# Altium PCB ICE_DfMux_QC.PcbDoc
Units mil, origin at the board's own origin, x right, y up, seen from the top; angles counter-clockwise.
Board outline 8460 x 2275 mil, 4 copper layers (Top Layer, Internal Plane 1, Internal Plane 2, Bottom Layer), stack 61.8 mil thick; 82 components, 163 nets, 561 pads, 63 vias.
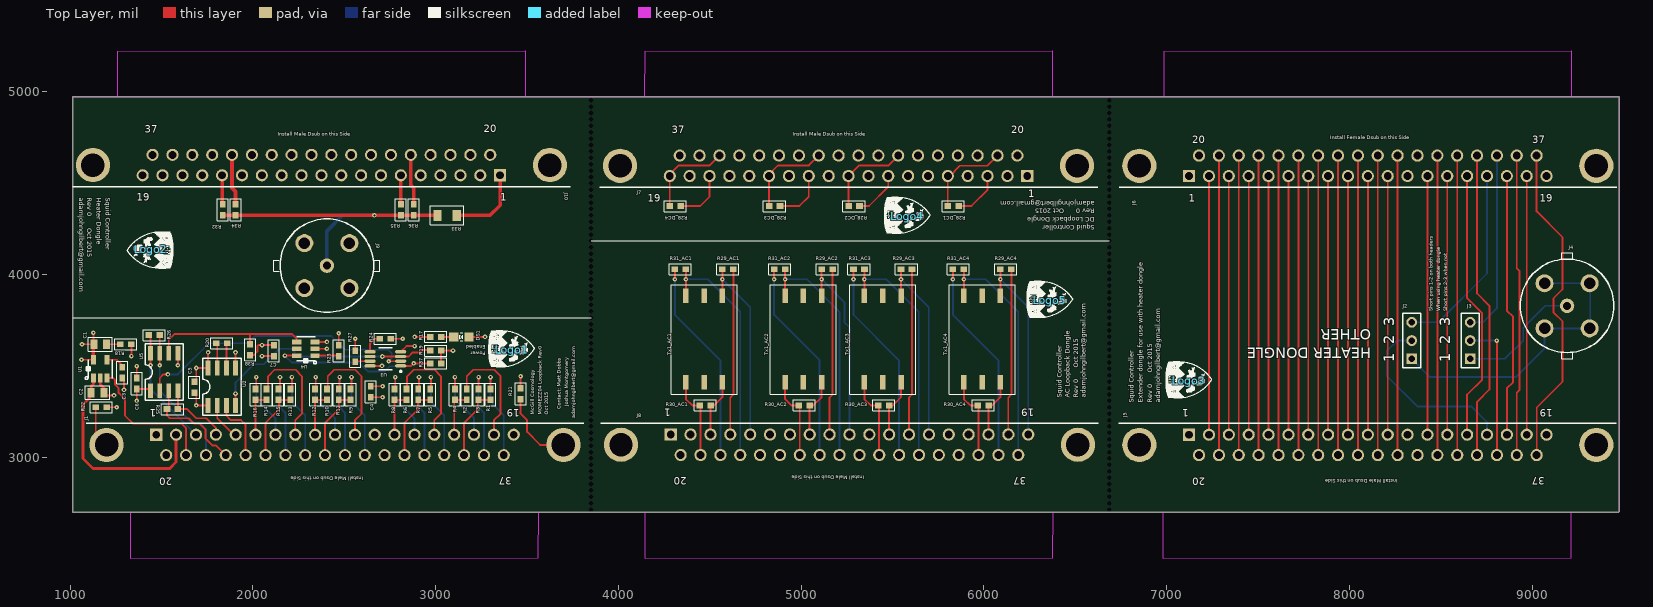
[diagram p0: Top Layer view]
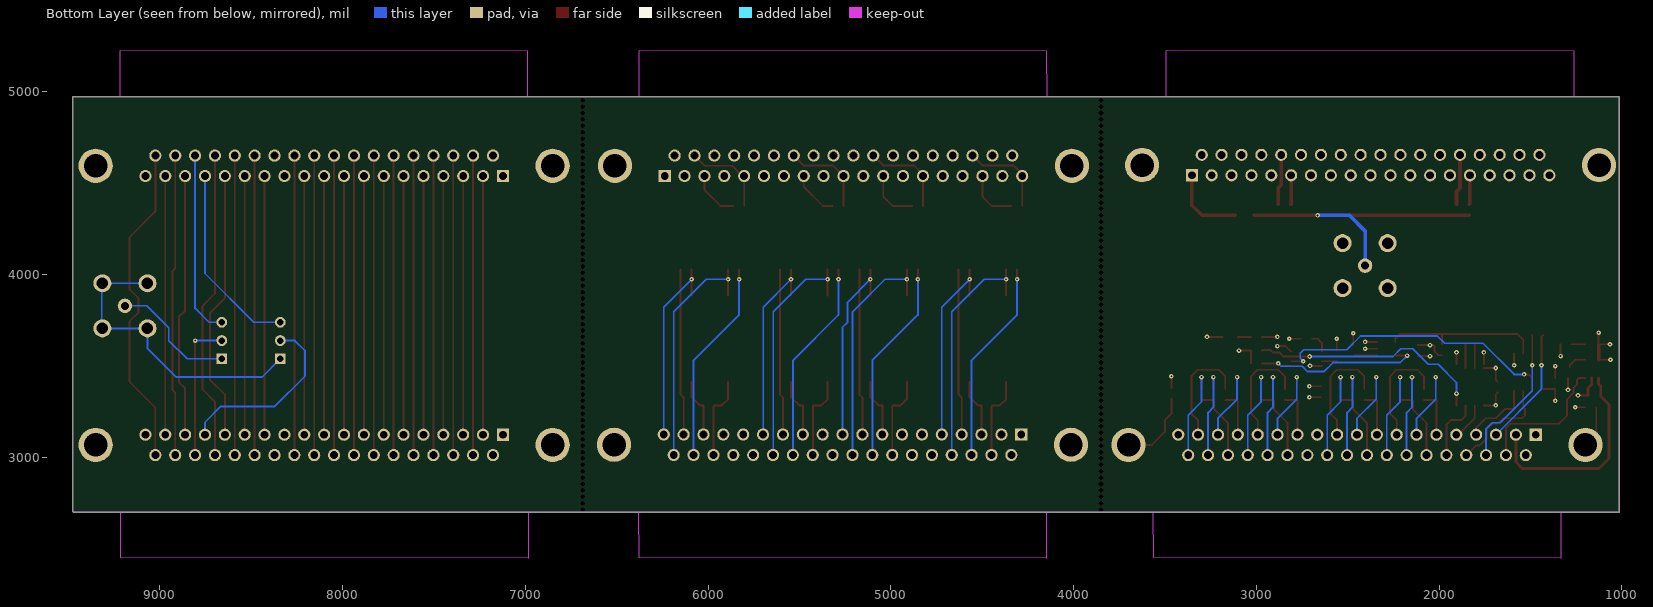
[diagram p1: Bottom Layer view, seen from below]
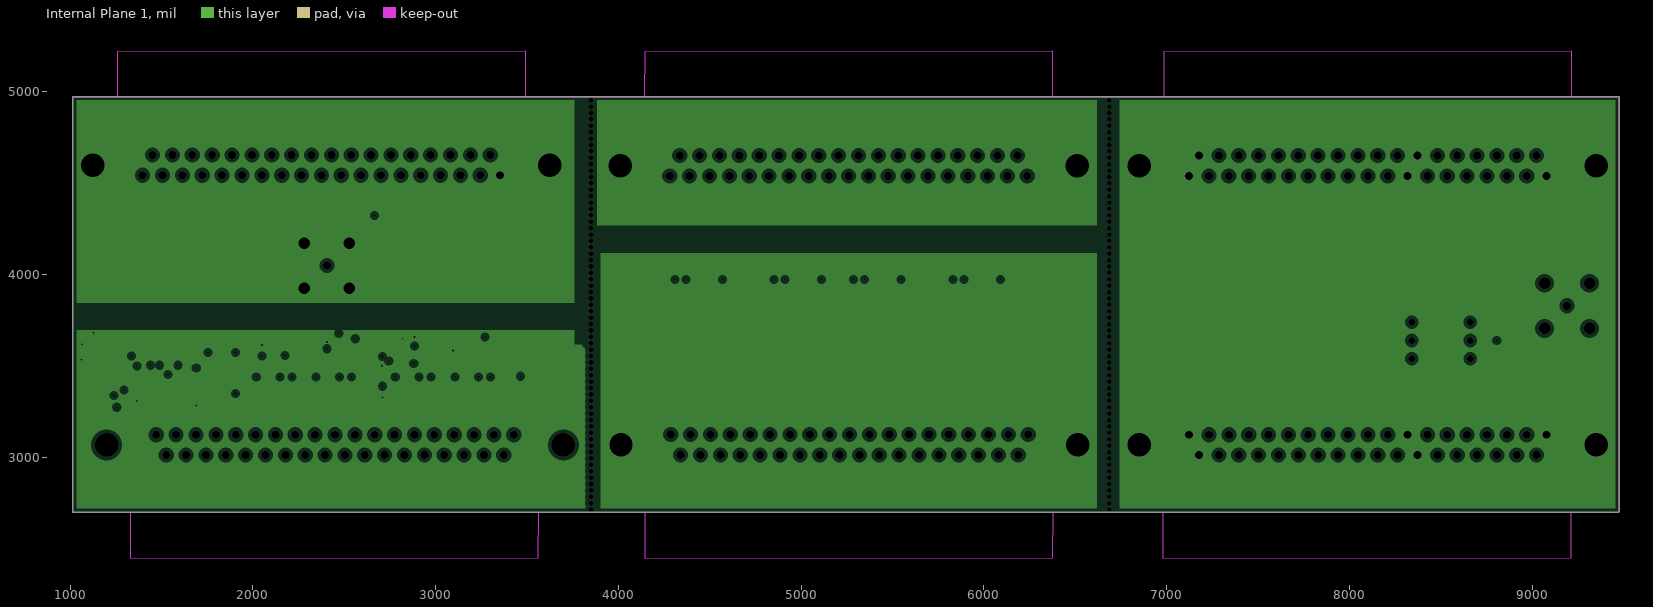
[diagram p2: Internal Plane 1, clearances drawn from the general rule]
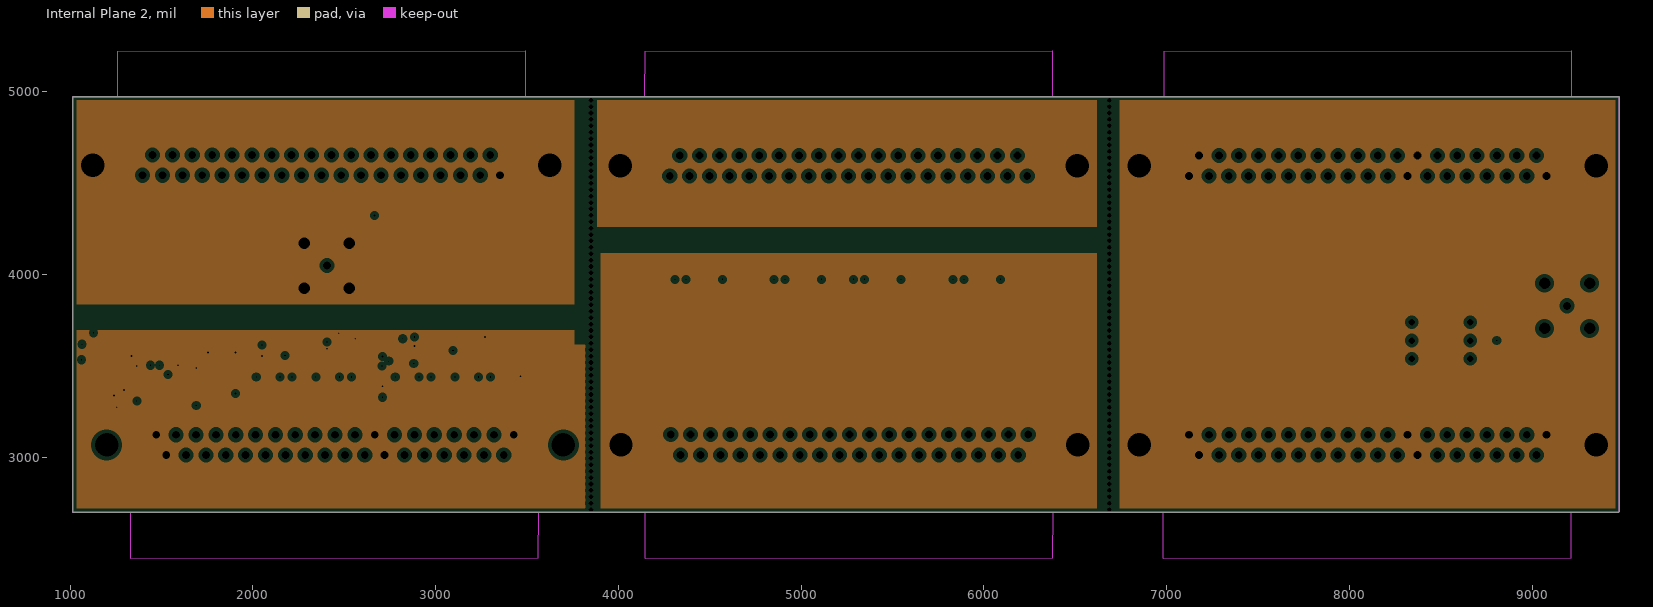
[diagram p3: Internal Plane 2, clearances drawn from the general rule]

## Layer stack, top to bottom
Top Solder: solder mask 0.4, Solder Resist, Dk 3.5
Top Layer: signal copper 0.7
Dielectric 1: core 6, FR-4, Dk 4.2
Internal Plane 1: plane copper 0.7, net (Multiple Nets)
Dielectric 3: prepreg 47, Dk 4.2
Internal Plane 2: plane copper 0.7, net GND
Dielectric 2: core 6, FR-4, Dk 4.2
Bottom Layer: signal copper 0.7
Bottom Solder: solder mask 0.4, Solder Resist, Dk 3.5

## Board outline
1015,2700 1015,4975 9475,4975 9475,2705 9470,2700

## Design rules (kind name [scope] priority, off if disabled: settings)
Clearance [All] p1: gap=7
DiffPairsRouting [All] p1: maxlimit=10 minlimit=10 mostfreqgap=10 toplayer_minwidth=15 toplayer_maxwidth=15 toplayer_prefwidth=15 bottomlayer_minwidth=15 bottomlayer_maxwidth=15 bottomlayer_prefwidth=15 maxuncoupledlength=500
HoleSize [All] p1: absolutevalues=TRUE maxlimit=200 minlimit=1 maxpercent=80.000 minpercent=20.000
MinimumSolderMaskSliver [All] p1: minsoldermaskwidth=3.49
PlaneClearance [All] p1: clearance=20
PlaneConnect [All] p1: planeconnectstyle=Relief reliefexpansion=20 reliefentries=4 reliefconductorwidth=10 reliefairgap=10
PolygonConnect [All] p1: connectstyle=Relief reliefconductorwidth=10 reliefentries=4 polygonreliefangle="90 Angle" airgapwidth=10
RoutingVias [All] p1: holewidth=28 width=50 viastyle="Through Hole" minholewidth=28 minwidth=50 maxholewidth=28 maxwidth=50
SilkToSilkClearance [All] p1: silktosilkclearance=0
SilkToSolderMaskClearance [IsPad] p1: minsilkscreentomaskgap=5 clearancetoexposedcopper=TRUE
SolderMaskExpansion [All] p1: expansion=4
Width [All] p1: maxlimit=100 minlimit=10 preferedwidth=10
23 further rules are at their usual default settings.

## Classes and differential pairs
component class SQDEX: J2 J3 J4 J5 J6 Logo2
component class SQD2: J8 Logo4
component class SQD1: J7 Logo3
component class M1: C1 C2 C3 C4 C5 C6 C7 DS1 J1 Logo1 R1 R2 R3 R4 R5 R6 R7 R8 R9 R10 R11 R12 R13 R14 R15 R16 R17 R18 R19 R20 R21 R22 R23 R24 R25 R26 R27 R37 R38 U1 U2 U3 U4 U5
channel class Transformer: AC1 AC2 AC3 AC4
channel class Resistor: DC1 DC2 DC3 DC4
component class SQD3: J9 J10 Logo5 R32 R33 R34 R35 R36
component class DC4: R28_DC4
component class DC3: R28_DC3
component class DC2: R28_DC2
component class DC1: R28_DC1
component class AC4: R29_AC4 R30_AC4 R31_AC4 Tx1_AC4
component class AC3: R29_AC3 R30_AC3 R31_AC3 Tx1_AC3
component class AC2: R29_AC2 R30_AC2 R31_AC2 Tx1_AC2
component class AC1: R29_AC1 R30_AC1 R31_AC1 Tx1_AC1
differential pair SDA_MOSI: +SDA_MOSI_P -SDA_MOSI_N
differential pair SDA_MISO: +SDA_MISO_P -SDA_MISO_N
differential pair SCL: +SCL_P -SCL_N

## Components (designator, comment, footprint, x,y, rotation, side; value= is the part's Value field where it differs from the comment)
C1 "4.7uF, 10V" 0805 1200,3620 r180 top
C2 "4.7uF, 10V" 0805 1185,3355 r180 top
C3 "470pF" 0603 1285,3435 r90 top
C4 "0.1uF" 0603 2645,3390 r270 top
C5 "0.1uF" 0603 1680,3415 r270 top
C6 "0.1uF" 0603 1365,3435 r270 top
C7 "0.1uF" 0603 2115,3555 r90 top
DS1 "LED, 0805, Green" 0805L 3099.42,3660 r0 top
J1 "DB37M" DSUB37-M 1199.25,3069.02 r180 top
J2 "Header 3pin 0.1\"" HDR1X3 8340,3540 r90 top
J3 "Header 3pin 0.1\"" HDR1X3 8660,3540 r90 top
J4 "Vertical BNC" BNCVert 9190,3830 r270 top
J5 "DB37M" DSUB37-M 6850.08,3069.09 r180 top
J6 "DB37F" DSUB37-F 8100,4540 r0 top
J7 "DB37M" DSUB37-M 6509,4596 r0 top
J8 "DB37M" DSUB37-M 4014,3070 r180 top
J9 "Vertical BNC" BNCVert 2405,4050 r0 top
J10 "DB37M" DSUB37-M 3625,4600 r0 top
Logo1 "McGillLogo" McGillLogo1 3415,3590 r90 top
Logo2 "McGillLogo" McGillLogo1 1440,4140 r270 top
Logo3 "McGillLogo" McGillLogo1 7120,3420 r90 top
Logo4 "McGillLogo" McGillLogo1 5580,4320 r90 top
Logo5 "McGillLogo" McGillLogo1 6360,3860 r90 top
R1 "348" 0603 3300,3315 r90 top
R2 "348" 0603 3170,3315 r90 top
R3 "348" 0603 3235,3315 r90 top
R4 "348" 0603 3105,3315 r90 top
R5 "348" 0603 2970,3315 r90 top
R6 "348" 0603 2840,3315 r90 top
R7 "348" 0603 2905,3315 r90 top
R8 "348" 0603 2775,3315 r90 top
R9 "348" 0603 2535,3315 r90 top
R10 "348" 0603 2405,3315 r90 top
R11 "348" 0603 2470,3315 r90 top
R12 "348" 0603 2340,3315 r90 top
R13 "348" 0603 2205,3315 r90 top
R14 "348" 0603 2075,3315 r90 top
R15 "348" 0603 2140,3315 r90 top
R16 "348" 0603 2015,3315 r90 top
R17 "499" 0603 2970,3660 r0 top
R18 "1" 0603 1335,3620 r180 top
R19 "4.99k" 0603 2970,3585 r0 top
R20 "DNL" 0603 1860,3625 r180 top
R21 "0" 0603 3465,3320 r90 top
R22 "0" 0603 1200,3275 r180 top
R23 "DNL" 0603 2470,3555 r90 top
R24 "4.99k" 0603 2695,3650 r0 top
R25 "100" 0603 1590,3265 r180 top
R26 "100" 0603 1430,3670 r0 top
R27 "4.99k" 0603 2560,3585 r270 top
R28_DC1 "10" 0603 5862,4376 r180 top (schematic designator R28)
R28_DC2 "10" 0603 5319,4376 r180 top (schematic designator R28)
R28_DC3 "10" 0603 4884,4376 r180 top (schematic designator R28)
R28_DC4 "10" 0603 4341,4376 r180 top (schematic designator R28)
R29_AC1 "1k" 0603 4629,4030 r180 top (schematic designator R29)
R29_AC2 "1k" 0603 5171.5,4030 r180 top (schematic designator R29)
R29_AC3 "1k" 0603 5606,4030 r180 top (schematic designator R29)
R29_AC4 "1k" 0603 6150,4030 r180 top (schematic designator R29)
R30_AC1 "10" 0603 4504,3285 r180 top (schematic designator R30)
R30_AC2 "10" 0603 5046.5,3285 r180 top (schematic designator R30)
R30_AC3 "10" 0603 5481,3285 r180 top (schematic designator R30)
R30_AC4 "10" 0603 6025,3285 r180 top (schematic designator R30)
R31_AC1 "1k" 0603 4309,4030 r0 top (schematic designator R31)
R31_AC2 "1k" 0603 4851.5,4030 r0 top (schematic designator R31)
R31_AC3 "1k" 0603 5286,4030 r0 top (schematic designator R31)
R31_AC4 "1k" 0603 5830,4030 r0 top (schematic designator R31)
R32 "10k" 0603 1835,4385 r270 top
R33 "100, 1206" 1206 3115,4325 r180 top
R34 "10k" 0603 1905,4385 r270 top
R35 "10k" 0603 2810,4385 r270 top
R36 "10k" 0603 2880,4385 r270 top
R37 "4.99k" 0603 2970,3515 r0 top
R38 "4.99k" 0603 1985,3620 r270 top
Tx1_AC1 "WB2010" WB2010 4569,3885 r270 top (schematic designator Tx1)
Tx1_AC2 "WB2010" WB2010 5111.5,3885 r270 top (schematic designator Tx1)
Tx1_AC3 "WB2010" WB2010 5546,3885 r270 top (schematic designator Tx1)
Tx1_AC4 "WB2010" WB2010 6090,3885 r270 top (schematic designator Tx1)
U1 "MIC5219-5.0YM5 TR" SOT23-5 1165,3435 r0 top
U2 "DS90C401M/NOPB" SO8 1755,3285 r90 top
U3 "P82B96DP,118" MSOP8-P82B96 2725,3540 r180 top
U4 "AD7414ARTZ-0500RL7" SOT23-6 2340,3595 r90 top
U5 "DS90C402M/NOPB" SO8 1440,3365 r90 top

## Footprints (in the part's own frame and the unit in brackets; to place one, negate y for a bottom-side part, rotate by r counter-clockwise, add the part's x,y. Pads: shape width x height; smd on the part's side, far side on the other; paste and mask are expansions set on the pad)
0603 [mil]
  rect 36x32 smd: 1(0,0) 2(60,0)
  silkscreen extent -31,-30 90,30, body extent -15,-15 75,15, height 39
0805 [mil]
  rect 38.5x52 smd: 1(0,0) 2(70,0)
  silkscreen extent -31,-38 101,38
0805L [mil] "0805 LED"
  rect 50x50 smd: 1(-0.4,0.18) 2(83.6,0.18)
  silkscreen extent 33,-22 50,22
1206 [mil]
  rect 45x60 smd: 1(0,0) 2(105,0)
  silkscreen extent -37,-51 144,51, body extent -30,-45 135,45, height 39
BNCVert [mm] "BNCVert"
  round 2.5 hole 1.6: 0(-3.13,3.13) 0(-3.13,-3.13) 0(3.13,3.13) 0(3.13,-3.13)
  round 2 hole 1.1: 1(0,0)
  silkscreen extent -7.37,-6.5 7.37,6.5
DSUB37-F [mm] "DSUB 37Pin Male"
  rect 1.69x1.69 hole 1.09: 1(-24.84,0)
  round 1.69 hole 1.09: 2(-22.08,0) 3(-19.32,0) 4(-16.56,0) 5(-13.8,0) 6(-11.04,0) 7(-8.28,0) 8(-5.52,0) 9(-2.76,0) 10(0,0) 11(2.76,0) 12(5.52,0) 13(8.28,0) 14(11.04,0) 15(13.8,0) 16(16.56,0) 17(19.32,0) 18(22.08,0) 19(24.84,0) 20(-23.461,2.84) 21(-20.701,2.84) 22(-17.941,2.84) 23(-15.181,2.84) 24(-12.421,2.84) 25(-9.661,2.84) 26(-6.901,2.84) 27(-4.141,2.84) 28(-1.381,2.84) 29(1.379,2.84) 30(4.139,2.84) 31(6.899,2.84) 32(9.659,2.84) 33(12.419,2.84) 34(15.179,2.84) 35(17.939,2.84) 36(20.699,2.84) 37(23.459,2.84)
  round 4.76 hole 3.26: 38(31.752,1.42) 39(-31.748,1.42)
  silkscreen extent -34.54,-1.58 34.6,-1.58, body extent -34.45,-2.03 34.86,17.04, height 12.55
DSUB37-M [mm] "DSUB 37Pin Male"
  rect 1.69x1.69 hole 1.09: 1(-6.912,-1.42)
  round 1.69 hole 1.09: 2(-9.672,-1.42) 3(-12.432,-1.42) 4(-15.192,-1.42) 5(-17.952,-1.42) 6(-20.712,-1.42) 7(-23.472,-1.42) 8(-26.232,-1.42) 9(-28.992,-1.42) 10(-31.752,-1.42) 11(-34.512,-1.42) 12(-37.272,-1.42) 13(-40.032,-1.42) 14(-42.792,-1.42) 15(-45.552,-1.42) 16(-48.312,-1.42) 17(-51.072,-1.42) 18(-53.832,-1.42) 19(-56.592,-1.42) 20(-8.291,1.42) 21(-11.051,1.42) 22(-13.811,1.42) 23(-16.571,1.42) 24(-19.331,1.42) 25(-22.091,1.42) 26(-24.851,1.42) 27(-27.611,1.42) 28(-30.371,1.42) 29(-33.131,1.42) 30(-35.891,1.42) 31(-38.651,1.42) 32(-41.411,1.42) 33(-44.171,1.42) 34(-46.931,1.42) 35(-49.691,1.42) 36(-52.451,1.42) 37(-55.211,1.42)
  round 4.76 hole 3.26: 38(0,0) 39(-63.5,0)
  silkscreen extent -66.29,-3 2.84,-3, body extent -66.21,-3.45 3.11,15.7, height 12.55
HDR1X3 [mm]
  rect 1.5x1.5 hole 0.889: 1(0,0)
  round 1.5 hole 0.889: 2(2.54,0) 3(5.08,0)
  silkscreen extent -1.27,-1.27 6.35,1.27
McGillLogo1 [mil] "McGillLogo"
  silkscreen extent -95,-127 106,124
MSOP8-P82B96 [mm] "TSOP, 8-Leads, Body 3.1x3.1mm (max), Pitch 0.65mm, IPC Medium Density"
  oval 1.55x0.45 smd paste-0.051 mask+0.102: 1(-2.125,0.975) 2(-2.125,0.325) 3(-2.125,-0.325) 4(-2.125,-0.975) 5(2.125,-0.975) 6(2.125,-0.325) 7(2.125,0.325) 8(2.125,0.975)
  silkscreen extent -2.25,-1.55 0.95,1.87, body extent -1.55,-1.55 1.55,1.55, height 1.1
SO8 [mil]
  round 10 on Top Overlay: 0(-40,40)
  rect 80x26 smd: 1(0,0) 2(0,-50) 3(0,-100) 4(0,-150) 5(205,-150) 6(205,-100) 7(205,-50) 8(205,0)
  silkscreen extent -52,-180 258,30, body extent -40,-165 245,15, height 39
SOT23-5 [mil]
  rect 26x50 smd: 1(-37.5,0) 2(0,0) 3(37.5,0) 4(37.5,100) 5(-37.5,100)
  silkscreen extent -83,-8 65,100
SOT23-6 [mil]
  rect 26x50 smd: 1(-37.5,0) 2(0,0) 3(37.5,0) 4(37.5,100) 5(0,100) 6(-37.5,100)
  silkscreen extent -83,-8 65,100
WB2010 [mm] "Transformer 1:1"
  round 0.508 on Top Overlay: 0(-2.032,1.524)
  rect 2x0.76 smd: 1(0,0) 2(0,-2.54) 3(0,-5.08) 4(12,-5.08) 5(12,-2.54) 6(12,0)
  silkscreen extent -1.52,-7.11 13.72,2.03

## Part data
C1 C2: library part "CAP 0805", "4.7uF 10V Capacitor, Ceramic, 0805"
C3: library part Cap0603, "470pF Capacitor, Ceramic, 0603"
C4 C5 C6 C7: library part Cap0603, "0.1uF 0603 Ceramic Capacitor"
DS1: library part LED, "LED GREEN CLEAR 0805 SMD"
J2 J3: library part Header3, "Header, 0.1\", 3-Pin straight"
J4 J9: library part BNCVertical
Logo1 Logo2 Logo3 Logo4 Logo5: library part Logo, "Silkscreen Logo"
R1 R2 R3 R4 R5 R6 R7 R8 R9 R10 R11 R12 R13 R14 R15 R16: library part Res0603, "348 Ohm RES 0603"
R17: library part "RES 0603", "499 Ohm RES 0603"
R18: library part Res0603, "1 Ohm RES 0603"
R19 R24 R27 R37 R38: library part Res0603, "4.99k Ohm RES 0603"
R20 R23: library part Res0603, "DO NOT LOAD (DNS)"
R21 R22: library part "RES 0603", "0 Ohm RES 0603"
R25 R26: library part "RES 0603", "100 Ohm RES 0603"
R28_DC1 R28_DC2 R28_DC3 R28_DC4 R30_AC1 R30_AC2 R30_AC3 R30_AC4: library part "RES 0603", "10 Ohm RES 0603"
R29_AC1 R29_AC2 R29_AC3 R29_AC4 R31_AC1 R31_AC2 R31_AC3 R31_AC4: library part "RES 0603", "1k RES 0603"
R32 R34 R35 R36: library part "RES 0603", "10k Ohm RES 0603"
R33: library part "RES 1206", "100 Ohm RES 1/4W 1206 SMD"
Tx1_AC1 Tx1_AC2 Tx1_AC3 Tx1_AC4: "WB2010 1:1 Transformer"
U1: library part TPS73601DBVR, "Adjustable 30uVrms noise 400mA regulator"
U2: "IC DRV LVDS DUAL DIFF SGNL 8SOIC"
U3: library part P82B96, "IC DUAL BI-DIR BUS BUFFER 8-TSSOP"
U4: "Digital Temperature Sensor, 11-Bit, +/-2 Degree Accurate"
U5: "IC REC LVDS DUAL DIFF SGNL 8SOIC"

## Free pads (board coordinates)
  round 10 hole 25 unplated: 3(3850,2715) 3(3850,2750) 3(3850,2785) 3(3850,2820) 3(3850,2855) 3(3850,2890) 3(3850,2925) 3(3850,2960) 3(3850,2995) 3(3850,3030) 3(3850,3065) 3(3850,3100) 3(3850,3135) 3(3850,3170) 3(3850,3205) 3(3850,3240) 3(3850,3275) 3(3850,3310) 3(3850,3345) 3(3850,3380) 3(3850,3415) 3(3850,3450) 3(3850,3485) 3(3850,3520) 3(3850,3555) 3(3850,3590) 3(3850,3625) 3(3850,3660) 3(3850,3695) 3(3850,3730) 3(3850,3765) 3(3850,3800) 3(3850,3835) 3(3850,3870) 3(3850,3905) 3(3850,3940) 3(3850,3975) 3(3850,4010) 3(3850,4045) 3(3850,4080) 3(3850,4115) 3(3850,4150) 3(3850,4185) 3(3850,4220) 3(3850,4255) 3(3850,4290) 3(3850,4325) 3(3850,4360) 3(3850,4395) 3(3850,4430) 3(3850,4465) 3(3850,4500) 3(3850,4535) 3(3850,4570) 3(3850,4605) 3(3850,4640) 3(3850,4675) 3(3850,4710) 3(3850,4745) 3(3850,4780) 3(3850,4815) 3(3850,4850) 3(3850,4885) 3(3850,4920) 3(3850,4955) 3(6685,2715) 3(6685,2750) 3(6685,2785) 3(6685,2820) 3(6685,2855) 3(6685,2890) 3(6685,2925) 3(6685,2960) 3(6685,2995) 3(6685,3030) 3(6685,3065) 3(6685,3100) 3(6685,3135) 3(6685,3170) 3(6685,3205) 3(6685,3240) 3(6685,3275) 3(6685,3310) 3(6685,3345) 3(6685,3380) 3(6685,3415) 3(6685,3450) 3(6685,3485) 3(6685,3520) 3(6685,3555) 3(6685,3590) 3(6685,3625) 3(6685,3660) 3(6685,3695) 3(6685,3730) 3(6685,3765) 3(6685,3800) 3(6685,3835) 3(6685,3870) 3(6685,3905) 3(6685,3940) 3(6685,3975) 3(6685,4010) 3(6685,4045) 3(6685,4080) 3(6685,4115) 3(6685,4150) 3(6685,4185) 3(6685,4220) 3(6685,4255) 3(6685,4290) 3(6685,4325) 3(6685,4360) 3(6685,4395) 3(6685,4430) 3(6685,4465) 3(6685,4500) 3(6685,4535) 3(6685,4570) 3(6685,4605) 3(6685,4640) 3(6685,4675) 3(6685,4710) 3(6685,4745) 3(6685,4780) 3(6685,4815) 3(6685,4850) 3(6685,4885) 3(6685,4920) 3(6685,4955)

## Via types
v1: diameter 25, hole 10, Top Layer to Bottom Layer, tented both sides, 63 vias

## Nets (pads, with @x,y where several pads share a name; then routed paths per layer and width w, separated by ;. In a path a pad name is that pad's centre, name@x,y a point inside that pad or via, vN(x,y) a via of type N, cw(c..) or ccw(c..) an arc to the next point about the centre after c; other vN are vias at no path point)
5VD: C1.2 C4.2 C5.2 C6.2 C7.2 R17.1 R19.2 R24.2 R37.2 R38.2 U1.5 U2.1 U3.8 U4.3 U5.1 | length 1200.5
  Top Layer w10: v1(1062.5,3535) U1.5 ; v1(1065,3620) C1.2 1127.5,3617.5 v1(1127.5,3682.5) ; v1(1365,3310) C6.2 U5.1@1430,3375 ; C5.2 1690,3345 v1(1690,3285) U2.1 ; R38.2 2005,3560 2025,3580 2025,3610 2030,3615 v1(2050,3615) C7.2 ; U4.3 v1(2405,3632.5) ; U3.8 v1(2706.34,3501.61) ; C4.2 v1(2710,3330) ; R24.2 v1(2820,3650) ; v1(2885,3660) R17.1 ; R37.2 R19.2 v1(3095,3585)
  Top Layer w20: U1.5 C1.2@1127.5,3617.5
ACCHAN1.BOLO_N: J8.36 R31_AC4.1 | length 1118.9
  Top Layer w10: v1(5830,3975) R31_AC4.1
  Bottom Layer w10: v1(5830,3975) 5830,3780 6078.74,3531.26 J8.36@6078.74,3014.09
ACCHAN1.BOLO_P: J8.18 R29_AC4.1 | length 911.1
  Top Layer w10: J8.18@6133.11,3125.91 6133.11,3328.11 6150,3345 R29_AC4.1
ACCHAN1.HEATER_P: J8.15
ACCHAN1.SQUID_BIAS_N: J8.34
ACCHAN1.SQUID_BIAS_P: J8.16
ACCHAN1.SQUID_COIL_N: J8.37 R31_AC4.2 Tx1_AC4.3 | length 1299.4
  Top Layer w10: Tx1_AC4.3 v1(5890,3975) R31_AC4.2
  Bottom Layer w10: v1(5890,3975) 6010,3975 6187.4,3797.6 J8.37@6187.4,3014.09
ACCHAN1.SQUID_COIL_P: J8.19 R29_AC4.2 Tx1_AC4.1 | length 1057
  Top Layer w10: Tx1_AC4.1 v1(6090,3975) R29_AC4.2
  Bottom Layer w10: v1(6090,3975) 6241.77,3823.23 J8.19@6241.77,3125.91
ACCHAN1.SQUID_SENSE_N: J8.17 R30_AC4.1 Tx1_AC4.6 | length 325.5
  Top Layer w10: J8.17@6024.45,3125.91 6024.45,3284.45 R30_AC4.1 6045,3285 6090,3330 Tx1_AC4.6
ACCHAN1.SQUID_SENSE_P: J8.35 R30_AC4.2 Tx1_AC4.4 | length 455.1
  Top Layer w10: Tx1_AC4.4 5890,3320 5925,3285 R30_AC4.2 5970,3280 5970,3195 5970.08,3194.92 J8.35@5970.08,3014.09
ACCHAN2.BOLO_N: J8.31 R31_AC3.1 | length 1118.9
  Top Layer w10: v1(5286,3975) R31_AC3.1
  Bottom Layer w10: v1(5286,3975) 5286,3780 5534.74,3531.26 J8.31@5534.74,3014.09
ACCHAN2.BOLO_P: J8.13 R29_AC3.1 | length 911.1
  Top Layer w10: J8.13@5589.11,3125.91 5589.11,3328.11 5606,3345 R29_AC3.1
ACCHAN2.HEATER_P: J8.33
ACCHAN2.SQUID_BIAS_N: J8.29
ACCHAN2.SQUID_BIAS_P: J8.11
ACCHAN2.SQUID_COIL_N: J8.32 R31_AC3.2 Tx1_AC3.3 | length 1299.4
  Top Layer w10: Tx1_AC3.3 v1(5346,3975) R31_AC3.2
  Bottom Layer w10: v1(5346,3975) 5466,3975 5643.4,3797.6 J8.32@5643.4,3014.09
ACCHAN2.SQUID_COIL_P: J8.14 R29_AC3.2 Tx1_AC3.1 | length 1057
  Top Layer w10: Tx1_AC3.1 v1(5546,3975) R29_AC3.2
  Bottom Layer w10: v1(5546,3975) 5697.77,3823.23 J8.14@5697.77,3125.91
ACCHAN2.SQUID_SENSE_N: J8.12 R30_AC3.1 Tx1_AC3.6 | length 325.5
  Top Layer w10: J8.12@5480.45,3125.91 5480.45,3284.45 R30_AC3.1 5501,3285 5546,3330 Tx1_AC3.6
ACCHAN2.SQUID_SENSE_P: J8.30 R30_AC3.2 Tx1_AC3.4 | length 455.1
  Top Layer w10: Tx1_AC3.4 5346,3320 5381,3285 R30_AC3.2 5426,3280 5426,3195 5426.08,3194.92 J8.30@5426.08,3014.09
ACCHAN3.BOLO_N: J8.27 R31_AC2.1 | length 1118.9
  Top Layer w10: v1(4851.5,3975) R31_AC2.1
  Bottom Layer w10: v1(4851.5,3975) 4851.5,3780 5100.24,3531.26 J8.27@5100.24,3014.09
ACCHAN3.BOLO_P: J8.9 R29_AC2.1 | length 911.1
  Top Layer w10: J8.9@5154.61,3125.91 5154.61,3328.11 5171.5,3345 R29_AC2.1
ACCHAN3.HEATER_P: J8.6
ACCHAN3.SQUID_BIAS_N: J8.25
ACCHAN3.SQUID_BIAS_P: J8.7
ACCHAN3.SQUID_COIL_N: J8.28 R31_AC2.2 Tx1_AC2.3 | length 1299.4
  Top Layer w10: Tx1_AC2.3 v1(4911.5,3975) R31_AC2.2
  Bottom Layer w10: v1(4911.5,3975) 5031.5,3975 5208.9,3797.6 J8.28@5208.9,3014.09
ACCHAN3.SQUID_COIL_P: J8.10 R29_AC2.2 Tx1_AC2.1 | length 1057.3
  Top Layer w10: Tx1_AC2.1 v1(5111.5,3975) R29_AC2.2
  Bottom Layer w10: v1(5111.5,3975) 5236.5,3850 5236.5,3740.5 5264.08,3712.92 J8.10
ACCHAN3.SQUID_SENSE_N: J8.8 R30_AC2.1 Tx1_AC2.6 | length 325.5
  Top Layer w10: J8.8@5045.95,3125.91 5045.95,3284.45 R30_AC2.1 5066.5,3285 5111.5,3330 Tx1_AC2.6
ACCHAN3.SQUID_SENSE_P: J8.26 R30_AC2.2 Tx1_AC2.4 | length 455.1
  Top Layer w10: Tx1_AC2.4 4911.5,3320 4946.5,3285 R30_AC2.2 4991.5,3280 4991.5,3195 4991.58,3194.92 J8.26@4991.58,3014.09
ACCHAN4.BOLO_N: J8.22 R31_AC1.1 | length 1118.9
  Top Layer w10: v1(4309,3975) R31_AC1.1
  Bottom Layer w10: v1(4309,3975) 4309,3780 4557.74,3531.26 J8.22
ACCHAN4.BOLO_P: J8.4 R29_AC1.1 | length 911.1
  Top Layer w10: J8.4 4612.11,3328.11 4629,3345 R29_AC1.1
ACCHAN4.HEATER_N: J8.1
ACCHAN4.HEATER_P: J8.24
ACCHAN4.SQUID_BIAS_N: J8.20
ACCHAN4.SQUID_BIAS_P: J8.2
ACCHAN4.SQUID_COIL_N: J8.23 R31_AC1.2 Tx1_AC1.3 | length 1299.4
  Top Layer w10: Tx1_AC1.3 v1(4369,3975) R31_AC1.2
  Bottom Layer w10: v1(4369,3975) 4489,3975 4666.4,3797.6 J8.23
ACCHAN4.SQUID_COIL_P: J8.5 R29_AC1.2 Tx1_AC1.1 | length 1057
  Top Layer w10: Tx1_AC1.1 v1(4569,3975) R29_AC1.2
  Bottom Layer w10: v1(4569,3975) 4720.77,3823.23 J8.5
ACCHAN4.SQUID_SENSE_N: J8.3 R30_AC1.1 Tx1_AC1.6 | length 325.5
  Top Layer w10: J8.3 4503.45,3284.45 R30_AC1.1 4524,3285 4569,3330 Tx1_AC1.6
ACCHAN4.SQUID_SENSE_P: J8.21 R30_AC1.2 Tx1_AC1.4 | length 455.1
  Top Layer w10: Tx1_AC1.4 4369,3320 4404,3285 R30_AC1.2 4449,3280 4449,3195 4449.08,3194.92 J8.21
CARRIER1_N: J1.18 R2.2 | length 619.1
  Top Layer w10: R2.2 3170,3445 3205,3480 3320,3480 3355,3445 3355,3240 3318.62,3203.62 J1.18
CARRIER1_P: J1.37 R1.2 | length 522.1
  Top Layer w10: R1.2 v1(3300,3440)
  Bottom Layer w10: v1(3300,3440) 3300,3305 3372.91,3232.09 J1.37
CARRIER2_N: J1.15 R6.2 | length 619.1
  Top Layer w10: R6.2@2844.02,3375 2844.02,3445 2879.02,3480 2994.02,3480 3029.02,3445 3029.02,3240 2992.64,3203.62 J1.15
CARRIER2_P: J1.34 R5.2 | length 522.1
  Top Layer w10: R5.2@2974.02,3375 v1(2974.02,3440)
  Bottom Layer w10: v1(2974.02,3440) 2974.02,3305 3046.93,3232.09 J1.34
CARRIER3_N: J1.11 R10.2 | length 619.1
  Top Layer w10: R10.2@2409.37,3375 2409.37,3445 2444.37,3480 2559.37,3480 2594.37,3445 2594.37,3240 2557.99,3203.62 J1.11
CARRIER3_P: J1.30 R9.2 | length 522.1
  Top Layer w10: R9.2@2539.37,3375 v1(2539.37,3440)
  Bottom Layer w10: v1(2539.37,3440) 2539.37,3305 2612.28,3232.09 J1.30
CARRIER4_N: J1.8 R14.2 | length 619.1
  Top Layer w10: R14.2@2083.39,3375 2083.39,3445 2118.39,3480 2233.39,3480 2268.39,3445 2268.39,3240 2232.01,3203.62 J1.8
CARRIER4_P: J1.27 R13.2 | length 522.1
  Top Layer w10: R13.2@2213.39,3375 v1(2213.39,3440)
  Bottom Layer w10: v1(2213.39,3440) 2213.39,3305 2286.3,3232.09 J1.27
DCCHAN1.BOLO_N: J7.36
DCCHAN1.BOLO_P: J7.18
DCCHAN1.HEATER_P: J7.15
DCCHAN1.SQUID_BIAS_N: J7.34
DCCHAN1.SQUID_BIAS_P: J7.16
DCCHAN1.SQUID_COIL_N: J7.37
DCCHAN1.SQUID_COIL_P: J7.19 J7.35 R28_DC4.2 | length 478
  Top Layer w10: R28_DC4.2@4280.69,4376 J7.19@4280.69,4539.82 ; J7.19@4280.97,4549.28 4329.69,4598 4498.76,4598 J7.35
DCCHAN1.SQUID_SENSE_N: J7.17 R28_DC4.1 | length 291.5
  Top Layer w10: R28_DC4.1@4340.69,4376 4446.69,4376 4498.29,4427.6 J7.17
DCCHAN2.BOLO_N: J7.31
DCCHAN2.BOLO_P: J7.13
DCCHAN2.HEATER_P: J7.33
DCCHAN2.SQUID_BIAS_N: J7.29
DCCHAN2.SQUID_BIAS_P: J7.11
DCCHAN2.SQUID_COIL_N: J7.32
DCCHAN2.SQUID_COIL_P: J7.14 J7.30 R28_DC3.2 | length 487.6
  Top Layer w10: R28_DC3.2 4824,4539.82 J7.14 4824.28,4549.28 4873,4598 5042.06,4598 J7.30
DCCHAN2.SQUID_SENSE_N: J7.12 R28_DC3.1 | length 291.5
  Top Layer w10: R28_DC3.1 4990,4376 5041.6,4427.6 J7.12
DCCHAN3.BOLO_N: J7.27
DCCHAN3.BOLO_P: J7.9
DCCHAN3.HEATER_P: J7.6
DCCHAN3.SQUID_BIAS_N: J7.25
DCCHAN3.SQUID_BIAS_P: J7.7
DCCHAN3.SQUID_COIL_N: J7.28
DCCHAN3.SQUID_COIL_P: J7.10 J7.26 R28_DC2.2 | length 482.6
  Top Layer w10: R28_DC2.2 5259,4540.02 J7.10 5258.92,4540.92 5315,4597 5475.71,4597 J7.26
DCCHAN3.SQUID_SENSE_N: J7.8 R28_DC2.1 | length 259.7
  Top Layer w10: R28_DC2.1 5371,4376 5476.25,4481.25 J7.8
DCCHAN4.BOLO_N: J7.22
DCCHAN4.BOLO_P: J7.4
DCCHAN4.HEATER_N: J7.1
DCCHAN4.HEATER_P: J7.24
DCCHAN4.SQUID_BIAS_N: J7.20
DCCHAN4.SQUID_BIAS_P: J7.2
DCCHAN4.SQUID_COIL_N: J7.23
DCCHAN4.SQUID_COIL_P: J7.5 J7.21 R28_DC1.2 | length 482.2
  Top Layer w10: R28_DC1.2 5802,4539.86 J7.5 5812.09,4540.09 5868,4596 6018.02,4596 J7.21
DCCHAN4.SQUID_SENSE_N: J7.3 R28_DC1.1 | length 269.8
  Top Layer w10: R28_DC1.1 5931,4376 6019.55,4464.55 J7.3
DEMOD1_N: J1.16 R2.1 R4.1 | length 256.6
  Top Layer w10: J1.16 3101.3,3311.3 R4.1 R2.1
DEMOD1_P: J1.35 R1.1 R3.1 | length 399.8
  Top Layer w10: J1.35 3155.59,3190.59 3230,3265 3230,3310 R3.1 R1.1
DEMOD2_N: J1.13 R6.1 R8.1 | length 256.6
  Top Layer w10: J1.13 2775.31,3311.3 2779.02,3315 R6.1@2844.02,3315
DEMOD2_P: J1.32 R5.1 R7.1 | length 399.8
  Top Layer w10: J1.32 2829.61,3190.59 2904.02,3265 2904.02,3310 2909.02,3315 R5.1@2974.02,3315
DEMOD3_N: J1.9 R10.1 R12.1 | length 256.6
  Top Layer w10: J1.9 2340.67,3311.3 2344.37,3315 R10.1@2409.37,3315
DEMOD3_P: J1.28 R9.1 R11.1 | length 399.8
  Top Layer w10: J1.28 2394.96,3190.59 2469.37,3265 2469.37,3310 2474.37,3315 R9.1@2539.37,3315
DEMOD4_N: J1.6 R14.1 R16.1 | length 256.6
  Top Layer w10: J1.6 2014.68,3311.3 2018.39,3315 R14.1@2083.39,3315
DEMOD4_P: J1.25 R13.1 R15.1 | length 399.8
  Top Layer w10: J1.25 2068.98,3190.59 2143.39,3265 2143.39,3310 2148.39,3315 R13.1@2213.39,3315
GND: C2.1 C3.1 C4.1 C5.1 C6.1 C7.1 DS1.2 J1.1 J1.12 J1.19 J1.20 J1.31 R18.1 R21.2 R22.1 R23.2 R27.1 U1.2 U2.5 U2.8 U3.4 U4.2 U5.5 | length 1313.3
  Top Layer w10: C2.1@1185,3340 v1(1240,3340) ; R22.1 v1(1255,3275) ; v1(1295,3370) C3.1@1295,3435 ; v1(1335,3555) R18.1 ; C6.1 v1(1365,3500) ; v1(1590,3505) U5.5 ; C5.1 1690,3425 v1(1690,3490) U2.8 ; U2.8@1755,3510 v1(1755,3575) ; U2.5@1905,3510 v1(1905,3575) ; v1(2050,3555) C7.1 ; U4.2 v1(2405,3595) ; R23.2 v1(2470,3680) ; R27.1 v1(2560,3650) ; C4.1 v1(2710,3390) ; U3.4 2840.28,3610 v1(2885,3610) ; DS1.2@3183.6,3660.18 3183.78,3660 v1(3270,3660) ; R21.2 v1(3465,3445)
  Top Layer w15: U1.2 1165,3400 1185,3380 C2.1@1185,3340
GND2: J9.0 J10.1 J10.38 J10.39 R33.1 | length 424.8
  Top Layer w20: R33.1 3297.88,4325 3352.88,4380 J10.1
GND3: J5.1 J5.12 J5.19 J5.20 J5.31 J5.38 J5.39 J6.1 J6.12 J6.19 J6.20 J6.31 J6.38 J6.39
GND4: J8.38 J8.39
GND5: J7.38 J7.39
HEATER1: J10.15 R32.1 | length 160.5
  Top Layer w20: J10.15 1831.62,4388.38 R32.1
HEATER2: J10.33 R34.1 | length 278.8
  Top Layer w20: J10.33 1885.99,4474.01 1905,4455 R34.1
HEATER3: J10.6 R35.1 | length 159.3
  Top Layer w20: J10.6 2809.57,4385.43 R35.1
HEATER4: J10.24 R36.1 | length 277.6
  Top Layer w20: J10.24 2863.94,4491.06 2880,4475 R36.1
NetC1_1: C1.1 R18.2 | length 75
  Top Layer w10: C1.1 R18.2
NetC3_2: C3.2 U1.4 | length 104.9
  Top Layer w10: U1.4 1255,3535 1285,3505 C3.2
NetDS1_1: DS1.1 R17.2 | length 69.7
  Top Layer w10: R17.2 3099.42,3660 DS1.1@3099.6,3660.18
NetJ1_38: J1.38 R22.2 | length 230.5
  Top Layer w10: R22.2 1140,3128.27 J1.38
NetJ1_39: J1.39 R21.1 | length 423.2
  Top Layer w10: R21.1 3465,3240 3500,3205 3500,3140 3570.98,3069.02 J1.39
NetJ2_1: J2.1 J4.0 | length 1685.7
  Bottom Layer w10: J2.1 8440,3440 8910,3440 9066.77,3596.77 9066.77,3706.77 9316.46,3706.77 9316.46,3953.23 J4.0@9070,3953.23
NetJ2_2: J2.2 J5.16 | length 1017.2
  Bottom Layer w10: J2.2 8260,3640 8205,3585 8205,3445 8370,3280 8665,3280 8752.12,3192.88 J5.16
NetJ2_3: J2.3 J6.16 | length 1055.6
  Bottom Layer w10: J2.3 8485,3740 8751.97,4006.97 J6.16
NetJ3_1: J3.1 J4.1 | length 726.1
  Bottom Layer w10: J3.1 8850,3540 8950,3640 8950,3710 9070,3830 J4.1@9225,3830
NetJ3_2: J3.2 J5.35 | length 772.4
  Top Layer w10: v1(8805,3640) 8806.42,3638.58 J5.35
  Bottom Layer w10: J3.2 v1(8805,3640)
NetJ3_3: J3.3 J6.35 | length 1013.4
  Bottom Layer w10: J3.3 8730,3740 8806.26,3816.26 J6.35
NetJ5_2: J5.2 J6.2 | length 1415
  Top Layer w10: J5.2 J6.2@7230.87,4540
NetJ5_3: J5.3 J6.3 | length 1415
  Top Layer w10: J5.3 J6.3@7339.53,4540
NetJ5_4: J5.4 J6.4 | length 1415
  Top Layer w10: J5.4 J6.4@7448.19,4540
NetJ5_5: J5.5 J6.5 | length 1415
  Top Layer w10: J5.5 J6.5@7556.85,4540
NetJ5_6: J5.6 J6.6 | length 1415
  Top Layer w10: J5.6 J6.6@7665.51,4540
NetJ5_7: J5.7 J6.7 | length 1415
  Top Layer w10: J5.7 J6.7@7774.17,4540
NetJ5_8: J5.8 J6.8 | length 1415
  Top Layer w10: J5.8 J6.8@7882.83,4540
NetJ5_9: J5.9 J6.9 | length 1415
  Top Layer w10: J5.9 J6.9@7991.49,4540
NetJ5_10: J5.10 J6.10 | length 1415
  Top Layer w10: J5.10 J6.10@8100.16,4540
NetJ5_11: J5.11 J6.11 | length 1415
  Top Layer w10: J5.11 J6.11@8208.82,4540
NetJ5_13: J5.13 J6.13 | length 1415
  Top Layer w10: J5.13 J6.13@8426.14,4540
NetJ5_14: J5.14 J6.14 | length 1415
  Top Layer w10: J5.14 J6.14@8534.8,4540
NetJ5_15: J5.15 J6.15 | length 1482.5
  Top Layer w10: J5.15 8643.46,3345 8725,3426.54 8725,3790 8643.46,3871.54 J6.15@8643.46,4540
NetJ5_17: J5.17 J6.17 | length 1443.3
  Top Layer w10: J5.17 8860.79,3378.71 8895,3412.92 8895,3770 8860.79,3804.21 J6.17@8860.79,4540
NetJ5_18: J5.18 J6.18 | length 1415
  Top Layer w10: J5.18 J6.18@8969.45,4540
NetJ5_21: J5.21 J6.21 | length 1638.6
  Top Layer w10: J5.21 J6.21@7285.16,4651.81
NetJ5_22: J5.22 J6.22 | length 1638.6
  Top Layer w10: J5.22 J6.22@7393.82,4651.81
NetJ5_23: J5.23 J6.23 | length 1638.6
  Top Layer w10: J5.23 J6.23@7502.48,4651.81
NetJ5_24: J5.24 J6.24 | length 1638.6
  Top Layer w10: J5.24 J6.24@7611.14,4651.81
NetJ5_25: J5.25 J6.25 | length 1638.6
  Top Layer w10: J5.25 J6.25@7719.8,4651.81
NetJ5_26: J5.26 J6.26 | length 1638.6
  Top Layer w10: J5.26 J6.26@7828.46,4651.81
NetJ5_27: J5.27 J6.27 | length 1638.6
  Top Layer w10: J5.27 J6.27@7937.12,4651.81
NetJ5_28: J5.28 J6.28 | length 1638.6
  Top Layer w10: J5.28 J6.28@8045.79,4651.81
NetJ5_29: J5.29 J6.29 | length 1638.6
  Top Layer w10: J5.29 J6.29@8154.45,4651.81
NetJ5_30: J5.30 J6.30 | length 1638.6
  Top Layer w10: J5.30 J6.30@8263.11,4651.81
NetJ5_32: J5.32 J6.32 | length 1638.6
  Top Layer w10: J5.32 J6.32@8480.43,4651.81
NetJ5_33: J5.33 J6.33 | length 1638.6
  Top Layer w10: J5.33 J6.33@8589.09,4651.81
NetJ5_34: J5.34 J6.34 | length 1694.4
  Top Layer w10: J6.34 8697.6,3897.4 8765,3830 8765,3372.25 8697.75,3305 J5.34
NetJ5_36: J5.36 J6.36 | length 1651
  Top Layer w10: J6.36 8914.92,4035.08 8930,4020 8930,3370 8915.08,3355.08 J5.36
NetJ5_37: J5.37 J6.37 | length 1797.1
  Top Layer w10: J6.37 9023.58,4346.42 9165,4205 9165,3920 9115,3870 9115,3795 9165,3745 9165,3415 9023.74,3273.74 J5.37
NetJ9_1: J9.1 R32.2 R33.2 R34.2 R35.2 R36.2 | length 1660.2
  Top Layer w20: R32.2 R34.2 R35.2 R36.2 R33.2
  Bottom Layer w20: J9.1 2405,4240 2490,4325 v1(2665,4325)
NetR19_1: R19.1 U2.4 U3.3 | length 1299.8
  Top Layer w10: U2.4 v1(1905,3350) ; v1(2708.66,3552.8) U3.3 2852.8,3552.8 2875,3575 2910,3575 2922.8,3587.8 2967.2,3587.8 R19.1
  Bottom Layer w10: v1(1905,3350) 1905,3410 2005,3510 2060,3510 2145,3595 2210,3595 2252.2,3552.8 v1(2708.66,3552.8)
NetR20_1: R20.1 U2.6 | length 137.1
  Top Layer w10: U2.6 1855,3620 R20.1
NetR20_2: R20.2 U2.7 | length 137.1
  Top Layer w10: R20.2 1805,3620 U2.7
NetR23_1: R23.1 U4.1 | length 131
  Top Layer w10: U4.1 2467.5,3557.5 R23.1
NetR24_1: R24.1 U3.5 | length 111.4
  Top Layer w10: U3.5 2641.34,3626.34 2665,3650 R24.1
NetR27_2: R27.2 U3.7 | length 82.3
  Top Layer w10: R27.2 2562.2,3527.2 U3.7
NetU3_2: U3.2 U5.2 | length 1589.2
  Top Layer w10: U5.2 1490,3435 1510,3455 v1(1535,3455) ; v1(2743.66,3527.2) U3.2
  Bottom Layer w10: v1(1535,3455) 1590,3455 1760,3625 1970,3625 2010,3665 2430,3665 2505,3590 2740,3590 2760,3570 2760,3543.54 v1(2743.66,3527.2)
NULLER1_N: J1.17 R4.2 | length 423.6
  Top Layer w10: R4.2 v1(3105,3440)
  Bottom Layer w10: v1(3105,3440) 3105,3320 3209.96,3215.04 J1.17
NULLER1_P: J1.36 R3.2 | length 504
  Top Layer w10: R3.2 v1(3235,3440)
  Bottom Layer w10: v1(3235,3440) 3235,3275 3264.25,3245.75 J1.36
NULLER2_N: J1.14 R8.2 | length 423.6
  Top Layer w10: R8.2@2779.02,3375 v1(2779.02,3440)
  Bottom Layer w10: v1(2779.02,3440) 2779.02,3320 2883.98,3215.04 J1.14
NULLER2_P: J1.33 R7.2 | length 504
  Top Layer w10: R7.2@2909.02,3375 v1(2909.02,3440)
  Bottom Layer w10: v1(2909.02,3440) 2909.02,3275 2938.27,3245.75 J1.33
NULLER3_N: J1.10 R12.2 | length 423.6
  Top Layer w10: R12.2@2344.37,3375 v1(2344.37,3440)
  Bottom Layer w10: v1(2344.37,3440) 2344.37,3320 2449.33,3215.04 J1.10
NULLER3_P: J1.29 R11.2 | length 504
  Top Layer w10: R11.2@2474.37,3375 v1(2474.37,3440)
  Bottom Layer w10: v1(2474.37,3440) 2474.37,3275 2503.62,3245.75 J1.29
NULLER4_N: J1.7 R16.2 | length 423.6
  Top Layer w10: R16.2@2018.39,3375 v1(2018.39,3440)
  Bottom Layer w10: v1(2018.39,3440) 2018.39,3320 2123.35,3215.04 J1.7
NULLER4_P: J1.26 R15.2 | length 504
  Top Layer w10: R15.2@2148.39,3375 v1(2148.39,3440)
  Bottom Layer w10: v1(2148.39,3440) 2148.39,3275 2177.64,3245.75 J1.26
P5V5FILT: C2.2 J1.2 U1.1 | length 1161
  Top Layer w15: U1.1 1127.5,3402.5 1115,3390 C2.2 1115,3335 1070,3290 1070,2995 1125,2940 1545,2940 1580,2975 J1.2 J1.2
POWEREN: J1.21 U1.3 | length 775
  Top Layer w10: U1.3 1235,3435 1245,3425 1245,3400 1265,3380 1265,3353.89 1300,3318.89 1300,3230 1345,3185 1610,3185 1634.33,3160.67 J1.21
SCL: R38.1 U4.4 U5.6 | length 865.3
  Top Layer w10: U5.6 1540,3645 1570,3675 2215,3675 2240,3650 U4.4 ; R38.1 1985,3670
SCL_N: J1.3 R26.1 U5.8 | length 652.2
  Top Layer w10: R26.1 1440,3660 U5.8 v1(1440,3505)
  Bottom Layer w10: v1(1440,3505) 1440,3373.62 J1.3
SCL_P: J1.22 R26.2 U5.7 | length 788
  Top Layer w10: v1(1490,3505) U5.7 R26.2
  Bottom Layer w10: v1(1490,3505) 1490,3365 1665,3190 1710,3190 1742.99,3157.01 J1.22
SDA: R37.1 U3.1 U4.6 | length 991.8
  Top Layer w10: v1(2175,3557.5) U4.6 ; U3.1 2866.61,3501.61 v1(2880,3515) R37.1
  Bottom Layer w10: v1(2175,3557.5) 2212.5,3520 2580,3520 2630,3470 2720,3470 2749.7,3499.7 2864.7,3499.7 v1(2880,3515)
SDA_MISO_N: J1.5 U2.2 | length 208.3
  Top Layer w10: U2.2 1805,3215 1895.08,3124.92 J1.5
SDA_MISO_P: J1.24 U2.3 | length 347.7
  Top Layer w10: U2.3 1855,3230 1880,3205 1935,3205 1960.31,3179.69 J1.24
SDA_MOSI_N: J1.4 R25.1 U5.4 | length 387.5
  Top Layer w10: U5.4 R25.1 1640,3265 1690,3215 1745,3215 1797.36,3162.64 J1.4
SDA_MOSI_P: J1.23 R25.2 U5.3 | length 579.9
  Top Layer w10: U5.3 1540,3275 R25.2 1530,3230 1545,3215 1650,3215 1680,3185 1710,3185 1740,3155 1740,3105 1780,3065 1799.76,3065 J1.23
pads on no net: J10.2 J10.3 J10.4 J10.5 J10.7 J10.8 J10.9 J10.10 J10.11 J10.12 J10.13 J10.14 J10.16 J10.17 J10.18 J10.19 J10.20 J10.21 J10.22 J10.23 J10.25 J10.26 J10.27 J10.28 J10.29 J10.30 J10.31 J10.32 J10.34 J10.35 J10.36 J10.37 Tx1_AC1.0 Tx1_AC1.2 Tx1_AC1.5 Tx1_AC2.0 Tx1_AC2.2 Tx1_AC2.5 Tx1_AC3.0 Tx1_AC3.2 Tx1_AC3.5 Tx1_AC4.0 Tx1_AC4.2 Tx1_AC4.5 U2.0 U3.6 U4.5 U5.0

## Polygon pours and split planes (outlines as drawn)
GND4 on Internal Plane 1 (split plane): 6620,2720.1 3900,2720.1 3900,4120 6620,4120
GND5 on Internal Plane 1 (split plane): 6620,4270.09 3880,4270.09 3880,4954.9 6620,4954.9
GND3 on Internal Plane 1 (split plane): 9454.9,2720.1 6740,2720.1 6740,4954.9 9454.9,4954.9
GND2 on Internal Plane 1 (split plane): 3760,3844 1035.1,3844 1035.1,4954.9 3760,4954.9
5VD on Internal Plane 1 (split plane): 3760,3620 3799.9,3620 3800.29,3616.08 3801.43,3612.31 3803.29,3608.83 3805.79,3605.79 3808.83,3603.29 3812.31,3601.43 3816.08,3600.29 3820,3599.9 3820,2720.1 1035.1,2720.1 1035.1,3700 3760,3700
GND4 on Internal Plane 2 (split plane): 6620,2720.1 3900,2720.1 3900,4120 6620,4120
GND5 on Internal Plane 2 (split plane): 6620,4260 3880,4260 3880,4954.9 6620,4954.9
GND3 on Internal Plane 2 (split plane): 9454.9,2720.1 6740,2720.1 6740,4954.9 9454.9,4954.9
GND2 on Internal Plane 2 (split plane): 3760,3837 1035.1,3837 1035.1,4954.9 3760,4954.9
GND on Internal Plane 2 (split plane): 3760,3620 3820,3620 3820,2720.1 1035.1,2720.1 1035.1,3700 3760,3700

## Keep-outs
Keep-Out Layer:
  lines w1: 1261,4975 1262,5223 3492,5225 3492,4975 ; 1332,2700 1332,2450 3562,2452 3563,2700 ; 4145,4975 4146,5223 6376,5225 6376,4975 ; 4147,2700 4147,2450 6377,2452 6378,2700 ; 6982,2700 6982,2450 9212,2452 9213,2700 ; 6986,4975 6987,5223 9217,5225 9217,4975 ; 1015,2700 9470,2700 9475,2705 9475,4975 1015,4975 1015,2700

## Other copper
Internal Plane 1 (plane layer: these items are gaps in the copper):
  rectangle: 3820,2700 3900,4140
  rectangle: 6620,2700 6740,4980
  rectangle: 3820,4120 6680,4260
  rectangle: 3760,3620 3880,4975
  rectangle: 1020,3700 3845,3844
  lines w40: 3820,3620 3840,3620 3860,3620
  lines w60: 3860,4240 6680,4240 ; 6680,2700 6680,4140 ; 6680,4120 6680,4260
Internal Plane 2 (plane layer: these items are gaps in the copper):
  rectangle: 1020,3700 3845,3837
  rectangle: 3760,3620 3880,4975
  rectangle: 3820,4120 6680,4260
  rectangle: 6620,2700 6740,4980
  rectangle: 3820,2700 3900,4140

## Silkscreen, mask and mechanical layers (free items; w line width, h text height)
Top Overlay:
  lines w5: 1015,3764 3850,3764 ; 3850,4185 6685,4185
  text "Install Male Dsub on this Side" at 2135,4760 h20
  text "Install Male Dsub on this Side" at 4955,4760 h20
  text "Install Female Dsub on this Side" at 7895,4740 h20
  text "adamjohngilbert@gmail.com" at 1050,4420 h25 r270
  text "Rev 0" at 1095,4420 h25 r270
  text "Heater Dongle" at 1146.67,4420 h25 r270
  text "Squid Controller" at 1195,4420 h25 r270
  text "adamjohngilbert@gmail.com" at 6605,4401 h25 r180
  text "Oct 2015" at 6440,4361 h25 r180
  text "Rev 0" at 6605,4361 h25 r180
  text "DC Loopback Dongle" at 6605,4314.33 h25 r180
  text "Squid Controller" at 6605,4271 h25 r180
  text "Oct 2015" at 1095,4255 h25 r270
  text "Short pins 1-2 on both headers" at 8455,3800 h20 r90
  text "When using heater dongle" at 8495,3800 h20 r90
  text "Short pins 2-3 when not" at 8535,3800 h20 r90
  text "OTHER" at 8120,3720 h100 r180
  text "HEATER DONGLE" at 8120,3620 h100 r180
  text "Enabled" at 3275,3615 h20 r180
  text "Power" at 3275,3580 h20 r180
  text "1  2  3" at 8265,3520 h100 r90
  text "1  2  3" at 8570,3520 h100 r90
  text "Oct 2015" at 6516,3491 h25 r90
  text "Oct 2015" at 6920,3465 h25 r90
  text "Squid Controller" at 6426,3326 h25 r90
  text "AC Loopback Dongle" at 6469.33,3326 h25 r90
  text "Rev 0" at 6516,3326 h25 r90
  text "adamjohngilbert@gmail.com" at 6556,3326 h25 r90
  text "Squid Controller" at 6820,3300 h25 r90
  text "Extender dongle for use with heater dongle" at 6868.33,3300 h25 r90
  text "Rev 0" at 6920,3300 h25 r90
  text "adamjohngilbert@gmail.com" at 6965,3300 h25 r90
  text "Joshua Montgomery" at 3725,3280 h20 r90
  text "Contact: Matt Dobbs" at 3685,3265 h20 r90
  text "McGill Cosmology" at 3540,3235 h20 r90
  text "MGMEZZ04 Loopback Rev0" at 3580,3235 h20 r90
  text "Oct 2015" at 3615,3235 h20 r90
  text "adamjohngilbert@gmail.com" at 3765,3215 h20 r90
  text "Install Male Dsub on this Side" at 5345,2900 h20 r180
  text "Install Male Dsub on this Side" at 2605,2895 h20 r180
  text "Install Male Dsub on this Side" at 8265,2880 h20 r180
Mechanical 1:
  lines w5: 3892,4155 3891,4154 ; 3891,4154 3891,2695 6633,2695 6633,4155 6633,4970 3891,4970 3891,4154 ; 1005,3780 1050,3780 3750,3780 3750,3790 3750,4015 3750,4975 1005,4975 1005,3780 ; 1015,2815 3815,2815 3815,3730 1015,3730 1015,2815 ; 6725,2695 9480,2695 9480,4970 6725,4970 6725,2695
Mechanical 2:
  lines w20: 1015,2700 9470,2700 9475,2705 9475,2720 9475,4975 1015,4975 1015,2700

## Dimensions
1015,4975 to 1015,2700 on Keep-Out Layer
1015,2700 to 9476,2740 on Keep-Out Layer
1015,4975 to 3492,5225 on Keep-Out Layer
3562,2452 to 3563,2700 on Keep-Out Layer

## Text inside footprints (layer, text, board x,y; h text height)
J1: Top Overlay "37" at 3417.15,2890.87 h40 r180; Top Overlay "1" at 1470.59,3264.88 h40 r180; Top Overlay "19" at 3460,3265 h40 r180; Top Overlay "20" at 1560,2890 h40 r180
J5: Top Overlay "37" at 9067.97,2890.94 h40 r180; Top Overlay "1" at 7121.42,3264.96 h40 r180; Top Overlay "19" at 9110.83,3265.08 h40 r180; Top Overlay "20" at 7210.83,2890.08 h40 r180
J6: Top Overlay "20" at 7140,4720 h40; Top Overlay "19" at 9040,4400 h40; Top Overlay "1" at 7120,4400 h40; Top Overlay "37" at 9000,4720 h40
J7: Top Overlay "37" at 4291.11,4774.15 h40; Top Overlay "1" at 6242,4424 h40; Top Overlay "19" at 4160,4400 h40; Top Overlay "20" at 6148.25,4775.02 h40
J8: Top Overlay "20" at 4374.75,2890.98 h40 r180; Top Overlay "19" at 6274.75,3265.98 h40 r180; Top Overlay "1" at 4285.34,3265.87 h40 r180; Top Overlay "37" at 6231.89,2891.85 h40 r180
J10: Top Overlay "20" at 3264.25,4779.02 h40; Top Overlay "19" at 1364.25,4404.02 h40; Top Overlay "1" at 3353.66,4404.13 h40; Top Overlay "37" at 1407.11,4778.15 h40